# Altium PCB Power transfer.PcbDoc
Units mil, origin at the board's own origin, x right, y up, seen from the top; angles counter-clockwise.
Board outline 6000 x 4000 mil, 2 copper layers (Top Layer, Bottom Layer); 2 components, 4 nets, 24 pads, 0 vias.
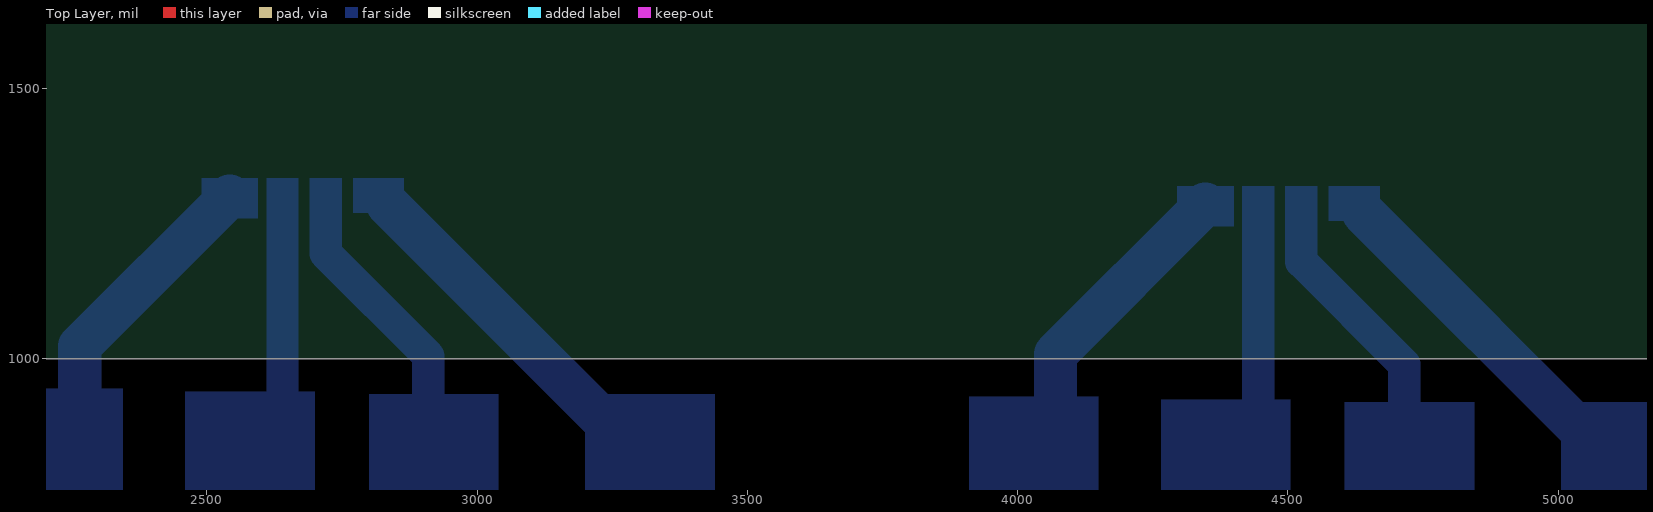
[diagram p0: Top Layer view]
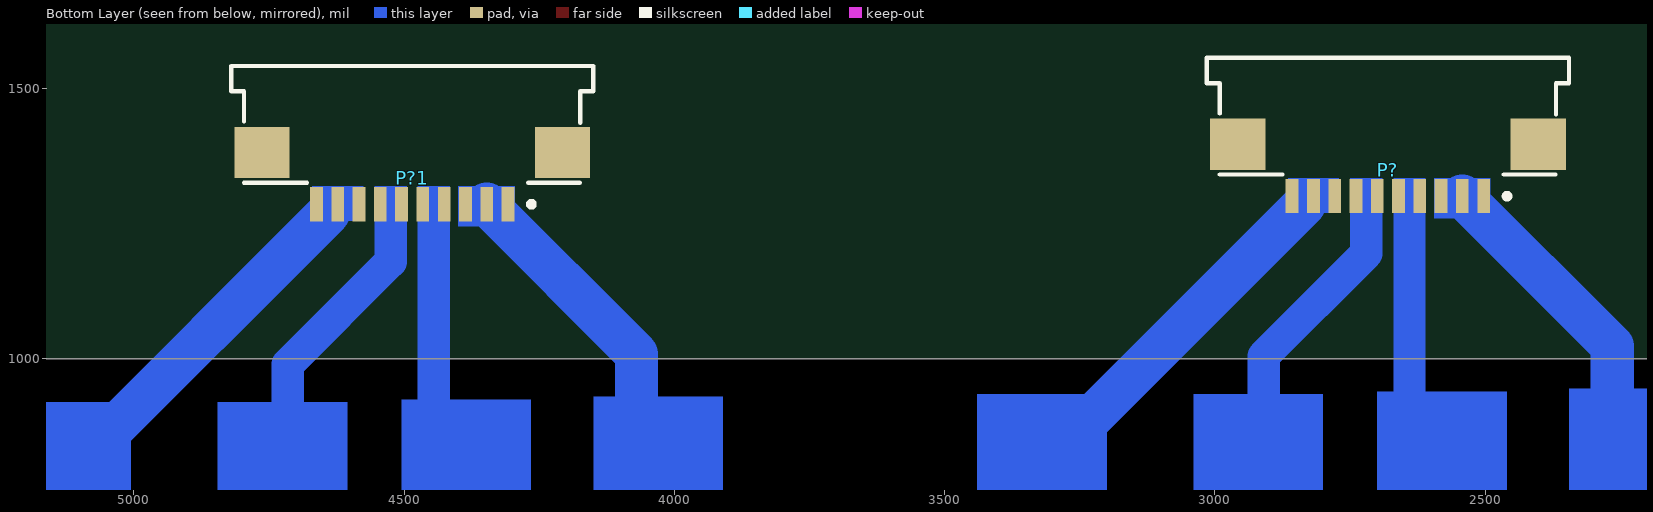
[diagram p1: Bottom Layer view, seen from below]

## Layer stack, top to bottom
Top Solder: solder mask 0.4, Solder Resist, Dk 3.5
Top Layer: signal copper 1.4
Dielectric 1: dielectric 12.6, FR-4, Dk 4.8
Bottom Layer: signal copper 1.4
Bottom Solder: solder mask 0.4, Solder Resist, Dk 3.5

## Board outline
1000,1000 7000,1000 7000,5000 1000,5000

## Design rules (kind name [scope] priority, off if disabled: settings)
Clearance [All] p1: gap=10
PolygonConnect [All] p1: connectstyle=Relief reliefconductorwidth=10 reliefentries=4 polygonreliefangle="90 Angle" airgapwidth=10
RoutingVias [All] p1: holewidth=28 width=50 viastyle="Through Hole" minholewidth=28 minwidth=50 maxholewidth=28 maxwidth=50
SolderMaskExpansion [All] p1: expansion=4
Width [All] p1: maxlimit=100 minlimit=10 preferedwidth=10 minimp=50.000000 maximp=50.000000 favimp=50.000000
30 further rules are at their usual default settings.

## Classes and differential pairs
component class Sheet1: P?

## Components (designator, comment, footprint, x,y, rotation, side; value= is the part's Value field where it differs from the comment)
P? "FPC-10" FPC-10 2680,1365 r0 bottom
P?1 "FPC-10" FPC-10 4485,1350 r0 bottom (schematic designator P?)

## Footprints (in the part's own frame and the unit in brackets; to place one, negate y for a bottom-side part, rotate by r counter-clockwise, add the part's x,y. Pads: shape width x height; smd on the part's side, far side on the other; paste and mask are expansions set on the pad)
FPC-10 [mm]
  rect 2.6x2.4 smd: 0(-7.061,-0.813) 0(7.061,-0.813)
  rect 0.6x1.6 smd: 1(-4.5,1.625) 2(-3.5,1.625) 3(-2.5,1.625) 4(-1.5,1.625) 5(-0.5,1.625) 6(0.5,1.625) 7(1.5,1.625) 8(2.5,1.625) 9(3.5,1.625) 10(4.5,1.625)
  silkscreen extent -8.51,-4.88 8.51,1.75, body extent -8.5,-4.89 8.5,1.91, height 2.8

## Part data
P? P?1: "软排线底座"

## Nets (pads, with @x,y where several pads share a name; then routed paths per layer and width w, separated by ;. In a path a pad name is that pad's centre, name@x,y a point inside that pad or via, vN(x,y) a via of type N, cw(c..) or ccw(c..) an arc to the next point about the centre after c; other vN are vias at no path point)
GND: P?.8 P?.9 P?.10 | length 646.4
  Bottom Layer w80: 2835,1285 3285,835 3295,835
IN_6V: P?.1 P?.2 P?.3 | length 575.8
  Bottom Layer w80: 2265,840 2265,1023.82 P?.2
M_6V: P?.4 P?.5 | length 460
  Bottom Layer w60: 2640,845 2640,1305
VCC: P?.6 P?.7 | length 498.7
  Bottom Layer w60: 2720,1305 2720,1195 2910,1005 2910,885
pads on no net: P?1.0 P?1.1 P?1.2 P?1.3 P?1.4 P?1.5 P?1.6 P?1.7 P?1.8 P?1.9 P?1.10 P?.0
copper on no net: | length 2180.9
  Bottom Layer w60: 4445,830 4445,1290 ; 4525,1290 4525,1180 4715,990 4715,870
  Bottom Layer w80: 4070,825 4070,1008.82 4347.2,1286.02 ; 4640,1270 5090,820 5100,820

## Other copper
Bottom Layer:
  region: 4150,665 4150,930 3910,930 3910,665
  region: 4475,1255 4475,1320 4415,1320 4415,1255
  region: 4400,1245 4400,1320 4295,1320 4295,1245
  region: 4555,1255 4555,1320 4495,1320 4495,1255
  region: 4670,1255 4670,1320 4575,1320 4575,1255
  region: 4505,660 4505,925 4265,925 4265,660
  region: 4845,655 4845,920 4605,920 4605,655
  region: 5245,655 5245,920 5005,920 5005,655
  region net GND: 3440,670 3440,935 3200,935 3200,670
  region net VCC: 3040,670 3040,935 2800,935 2800,670
  region net M_6V: 2700,675 2700,940 2460,940 2460,675
  region net GND: 2865,1270 2865,1335 2770,1335 2770,1270
  region net VCC: 2750,1270 2750,1335 2690,1335 2690,1270
  region net IN_6V: 2595,1260 2595,1335 2490,1335 2490,1260
  region net M_6V: 2670,1270 2670,1335 2610,1335 2610,1270
  region net IN_6V: 2345,680 2345,945 2105,945 2105,680